# Altium PCB LEDPCB.PcbDoc
Units mm, origin at the board's own origin, x right, y up, seen from the top; angles counter-clockwise.
Board outline 20 x 20 mm, 2 copper layers (Top Layer, Bottom Layer), stack 1.671 mm thick; 5 components, 4 nets, 10 pads, 1 vias.
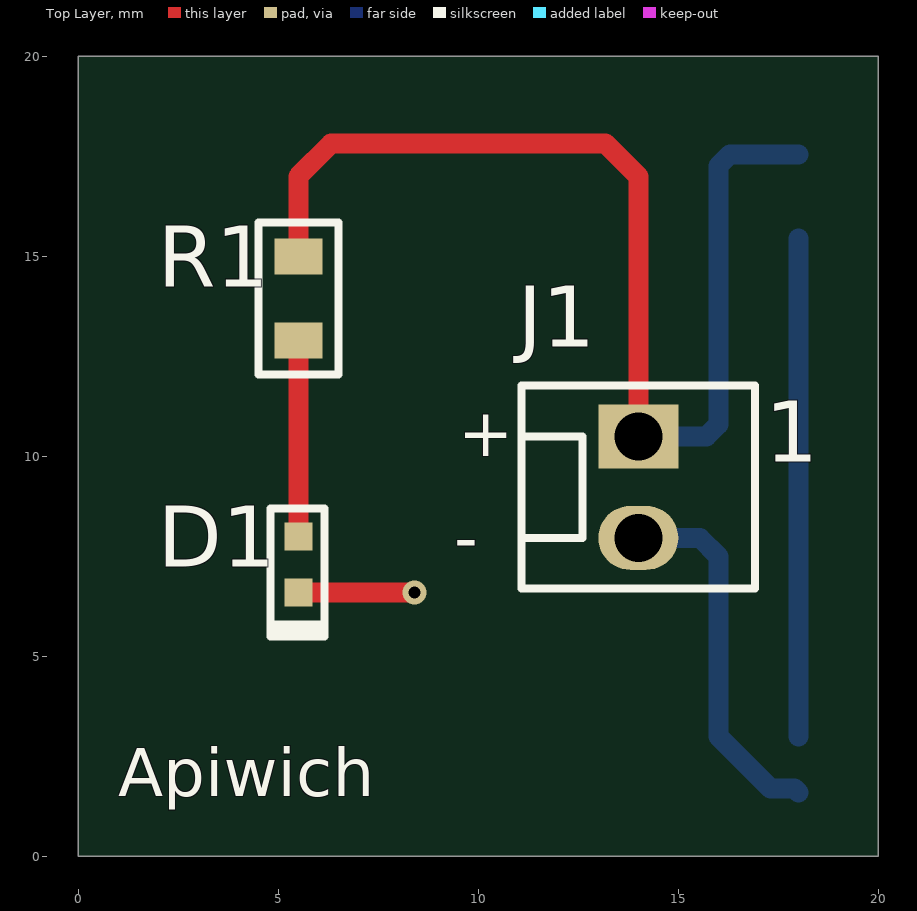
[diagram p0: Top Layer view]
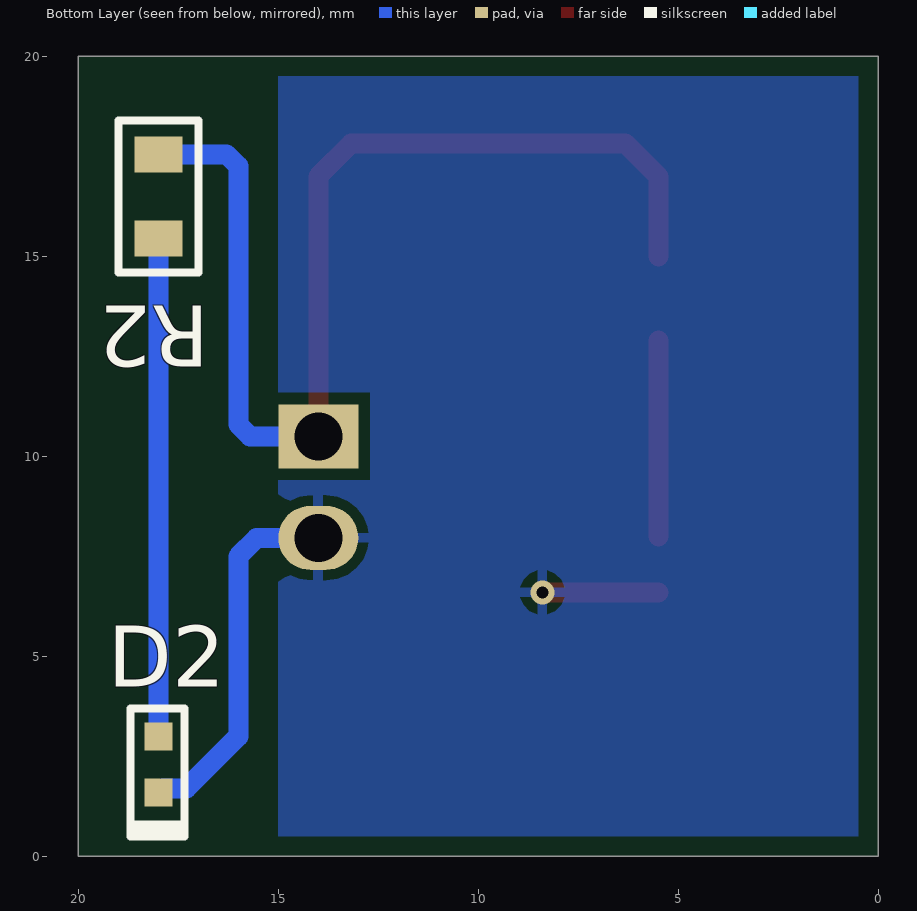
[diagram p1: Bottom Layer view, seen from below]
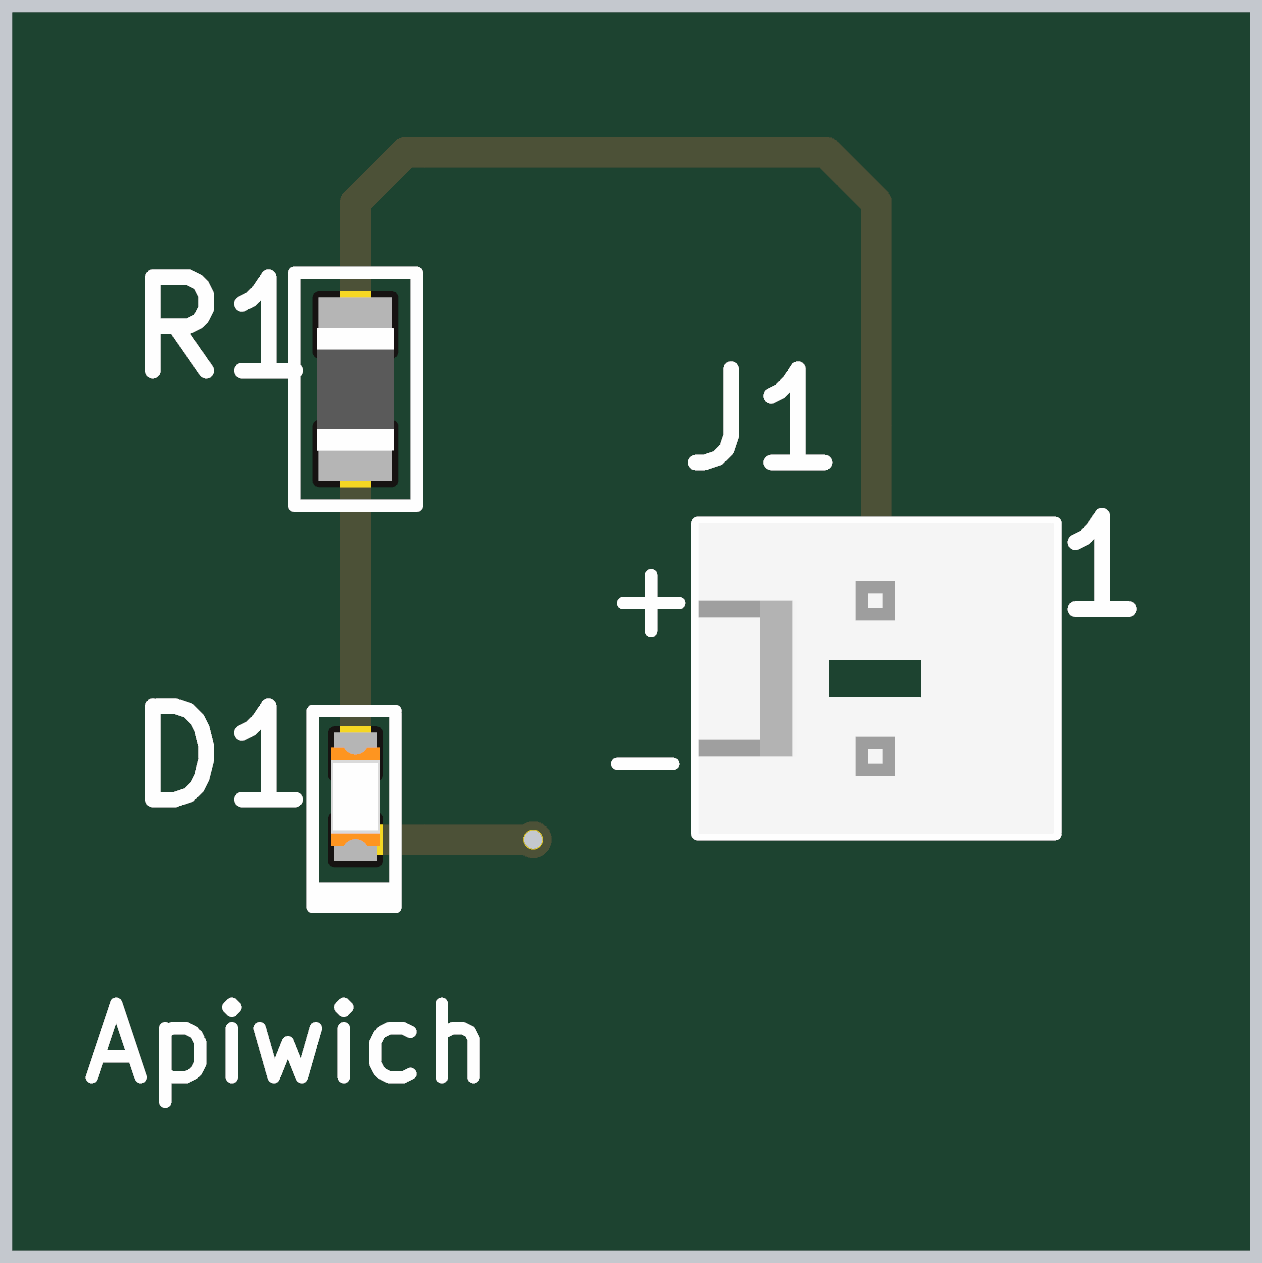
[diagram p2: 3D render of the assembled board from above, using the file's embedded part models]

## Layer stack, top to bottom
Top Solder: solder mask 0.0102, Solder Resist, Dk 3.5
Top Layer: signal copper 0.0356
Dielectric 1: dielectric 1.6, FR-4, Dk 4.8
Bottom Layer: signal copper 0.0356
Bottom Solder: solder mask 0.0102, Solder Resist, Dk 3.5

## Board outline
0,0 20,0 20,20 0,20

## Design rules (kind name [scope] priority, off if disabled: settings)
Clearance [All] p1: gap=0.3 ignorepadtopadclearanceinfootprint=FALSE
PolygonConnect [All] p1: connectstyle=Relief reliefconductorwidth=0.254 reliefentries=4 polygonreliefangle="90 Angle" airgapwidth=0.254
RoutingVias [All] p1: holewidth=0.3 width=0.6 viastyle="Through Hole" minholewidth=0.3 minwidth=0.6 maxholewidth=0.3 maxwidth=0.6
SilkToSolderMaskClearance [IsPad] p1: minsilkscreentomaskgap=0.1 clearancetoexposedcopper=TRUE
SolderMaskExpansion [All] p1: expansion=0.102 istentingtop=FALSE
SupplyNets "Schematic Supply Nets_1" [InNet('Ground')] p1: voltage=0.000
SupplyNets "Schematic Supply Nets" [InNet('+3V3')] p2: voltage=0.000
Width [All] p1: maxlimit=1 minlimit=0.3 preferedwidth=0.5
29 further rules are at their usual default settings.

## Components (designator, comment, footprint, x,y, rotation, side; value= is the part's Value field where it differs from the comment)
D1 "GREEN" LED0603G 5.5,7.3 r90 top
D2 "GREEN" LED0603G 18,2.3 r90 bottom
J1 "1x2 Header" HDR1x2 14,10.5 r0 top
R1 "360R" R0805 5.5,13.95 r270 top value=360Ω
R2 "360R" R0805 18,16.5 r270 bottom value=360Ω

## Footprints (in the part's own frame and the unit in brackets; to place one, negate y for a bottom-side part, rotate by r counter-clockwise, add the part's x,y. Pads: shape width x height; smd on the part's side, far side on the other; paste and mask are expansions set on the pad)
HDR1x2 [mm]
  rect 2x1.6 hole 1.2: 1(0,0)
  oval 2x1.6 hole 1.2: 2(0,-2.54)
  silkscreen extent -2.92,-3.81 2.92,1.27, body extent -2.9,-3.81 2.9,1.27, height 11.71
LED0603G [mm]
  rect 0.7x0.7 smd: 1(-0.7,0) 2(0.7,0)
  silkscreen extent -1.8,-0.65 1.4,0.7, body extent -0.8,-0.4 0.8,0.4, height 0.59
R0805 [mm]
  rect 0.9x1.2 smd: 1(-1.05,0) 2(1.05,0)
  silkscreen extent -1.9,-1 1.9,1, body extent -1,-0.63 1,0.63, height 0.61

## Part data
D1 D2: library part LSM0603453V, "LED GREEN CLEAR CHIP 0603 SMD", Case/Package=0603, Color=Green, Forward Current=20mA, Forward Voltage=3.4V, Manufacturer=VCC, Max Operating Temperature=85°C, Min Operating Temperature=-40°C, Power Dissipation=60mW, Reverse Voltage=5V, Supplier Part Number=LSM0603453VCT-ND, Category=LEDs, ComponentLink1Description=https://datasheet.octopart.com:443/LSM0603453V-Visual-Communications-datasheet-166617523.pdf?src-supplier=RS+(Formerly+Allied+Electronics), ComponentLink1URL=https://datasheet.octopart.com:443/LSM0603453V-Visual-Communications-datasheet-166617523.pdf?src-supplier=RS+(Formerly+Allied+Electronics), ComponentLink2Description=https://datasheet.octopart.com:443/LSM0603453V-Visual-Communications-datasheet-120107411.pdf?src-supplier=VCC, ComponentLink2URL=https://datasheet.octopart.com:443/LSM0603453V-Visual-Communications-datasheet-120107411.pdf?src-supplier=VCC, Height=600µm, Lifecycle Status=Production, Luminous Intensity=120mcd, Manufacturer Part Number=LSM0603453V, Mounting Technology="Surface Mount", Number of Circuits=1, Number of Terminals=2, Pricing="1=0.39, 10=0.266, 100=0.1218, 500=0.1086, 1000=0.1071 (USD)", REACH SVHC=Yes, RoHS=Compliant, Schedule B="8541402000, 8541406050, 8541406050|8541406050|8541406050|8541406050|8541406050", Shape=Rectangular, Stock=28175, Supplier=DigiKey, Terminal Pitch=1.3mm, Viewing Angle=110°, Wavelength=576nm
J1: library part 22-27-2021, "CONN HEADER VERT 2POS 2.54MM", Color=White, Contact Resistance=10mΩ, Current Rating=4A, Dielectric Material=Polyamide, Flammability Rating="UL94 V-0", Housing Color=Natural, Insulation Resistance=1GΩ, Manufacturer=Molex, Manufacturer Lifecycle Status=ACTIVE, Max Operating Temperature=75°C, Min Operating Temperature=0°C, Supplier Part Number=WM4111-ND, Voltage Rating=500V, Voltage Rating (AC)=250V, Approvals="CSA, UL", Category="Headers and Wire Housings", China RoHS=Compliant, ComponentLink1Description=https://datasheet.octopart.com:443/22-27-2021-Molex-datasheet-81843831.pdf?src-supplier=Upverter, ComponentLink1URL=https://datasheet.octopart.com:443/22-27-2021-Molex-datasheet-81843831.pdf?src-supplier=Upverter, ComponentLink2Description=https://datasheet.octopart.com:443/22-27-2021-Molex-datasheet-10979409.pdf?src-supplier=Molex, ComponentLink2URL=https://datasheet.octopart.com:443/22-27-2021-Molex-datasheet-10979409.pdf?src-supplier=Molex, ComponentLink3Description=https://datasheet.octopart.com:443/02227-2021-Molex-datasheet-13784872.pdf?src-supplier=Molex, ComponentLink3URL=https://datasheet.octopart.com:443/02227-2021-Molex-datasheet-13784872.pdf?src-supplier=Molex, ComponentLink4Description=https://datasheet.octopart.com:443/22-27-2021-Molex-datasheet-5315839.pdf?src-supplier=Future+Electronics, ComponentLink4URL=https://datasheet.octopart.com:443/22-27-2021-Molex-datasheet-5315839.pdf?src-supplier=Future+Electronics, ComponentLink5Description=https://datasheet.octopart.com:443/22272021-Molex-datasheet-137316104.pdf?src-supplier=Future+Electronics, ComponentLink5URL=https://datasheet.octopart.com:443/22272021-Molex-datasheet-137316104.pdf?src-supplier=Future+Electronics, ComponentLink6Description=https://datasheet.octopart.com:443/22-27-2021-Molex-datasheet-154747145.pdf?src-supplier=Master+Electronics, ComponentLink6URL=https://datasheet.octopart.com:443/22-27-2021-Molex-datasheet-154747145.pdf?src-supplier=Master+Electronics, ComponentLink7Description=https://datasheet.octopart.com:443/22-27-2021-Molex-datasheet-101581847.pdf?src-supplier=Farnell, ComponentLink7URL=https://datasheet.octopart.com:443/22-27-2021-Molex-datasheet-101581847.pdf?src-supplier=Farnell, ComponentLink8Description=https://datasheet.octopart.com:443/02227-2021-Molex-datasheet-14711101.pdf?src-supplier=Farnell, ComponentLink8URL=https://datasheet.octopart.com:443/02227-2021-Molex-datasheet-14711101.pdf?src-supplier=Farnell, ComponentLink9Description=https://datasheet.octopart.com:443/22-27-2021-Molex-datasheet-506551.pdf?src-supplier=Farnell, ComponentLink9URL=https://datasheet.octopart.com:443/22-27-2021-Molex-datasheet-506551.pdf?src-supplier=Farnell, ComponentLink10Description=https://datasheet.octopart.com:443/22-27-2021-Molex-datasheet-21538535.pdf?src-supplier=Newark, ComponentLink10URL=https://datasheet.octopart.com:443/22-27-2021-Molex-datasheet-21538535.pdf?src-supplier=Newark, ComponentLink11Description=https://datasheet.octopart.com:443/22-27-2021-Molex-datasheet-38329585.pdf?src-supplier=Newark, ComponentLink11URL=https://datasheet.octopart.com:443/22-27-2021-Molex-datasheet-38329585.pdf?src-supplier=Newark, ComponentLink12Description=https://datasheet.octopart.com:443/22-27-2021-Molex-datasheet-33021744.pdf?src-supplier=Newark, ComponentLink12URL=https://datasheet.octopart.com:443/22-27-2021-Molex-datasheet-33021744.pdf?src-supplier=Newark, ComponentLink13Description=https://datasheet.octopart.com:443/22-27-2021-Molex-datasheet-33002331.pdf?src-supplier=Newark, ComponentLink13URL=https://datasheet.octopart.com:443/22-27-2021-Molex-datasheet-33002331.pdf?src-supplier=Newark, ComponentLink14Description=https://datasheet.octopart.com:443/02227-2021-Molex-datasheet-21206939.pdf?src-supplier=Newark, ComponentLink14URL=https://datasheet.octopart.com:443/02227-2021-Molex-datasheet-21206939.pdf?src-supplier=Newark, ComponentLink15Description=https://datasheet.octopart.com:443/22-27-2021-Molex-datasheet-604178.pdf?src-supplier=element14+APAC, ComponentLink15URL=https://datasheet.octopart.com:443/22-27-2021-Molex-datasheet-604178.pdf?src-supplier=element14+APAC, ComponentLink16Description=https://datasheet.octopart.com:443/0022272021-Molex-datasheet-164461543.pdf?src-supplier=Sager+Electronics, ComponentLink16URL=https://datasheet.octopart.com:443/0022272021-Molex-datasheet-164461543.pdf?src-supplier=Sager+Electronics, ComponentLink17Description=https://datasheet.octopart.com:443/22-27-2021-Molex-datasheet-158567618.pdf?src-supplier=RS+(Formerly+Allied+Electronics), ComponentLink17URL=https://datasheet.octopart.com:443/22-27-2021-Molex-datasheet-158567618.pdf?src-supplier=RS+(Formerly+Allied+Electronics), ComponentLink18Description=https://datasheet.octopart.com:443/22-27-2021-Molex-datasheet-140181058.pdf?src-supplier=RS+(Formerly+Allied+Electronics), ComponentLink18URL=https://datasheet.octopart.com:443/22-27-2021-Molex-datasheet-140181058.pdf?src-supplier=RS+(Formerly+Allied+Electronics), ComponentLink19Description=https://datasheet.octopart.com:443/22-27-2021-Molex-datasheet-120145351.pdf?src-supplier=RS+(Formerly+Allied+Electronics), ComponentLink19URL=https://datasheet.octopart.com:443/22-27-2021-Molex-datasheet-120145351.pdf?src-supplier=RS+(Formerly+Allied+Electronics), ComponentLink20Description=https://datasheet.octopart.com:443/22-27-2021-Molex-datasheet-9995492.pdf?src-supplier=RS+(Formerly+Allied+Electronics), ComponentLink20URL=https://datasheet.octopart.com:443/22-27-2021-Molex-datasheet-9995492.pdf?src-supplier=RS+(Formerly+Allied+Electronics), ComponentLink21Description=https://datasheet.octopart.com:443/22-27-2021-Molex-datasheet-155977274.pdf?src-supplier=SOS+electronic, ComponentLink21URL=https://datasheet.octopart.com:443/22-27-2021-Molex-datasheet-155977274.pdf?src-supplier=SOS+electronic, ComponentLink22Description=https://datasheet.octopart.com:443/22-27-2021-Molex-datasheet-62103479.pdf?src-supplier=Electro+Sonic, ComponentLink22URL=https://datasheet.octopart.com:443/22-27-2021-Molex-datasheet-62103479.pdf?src-supplier=Electro+Sonic, ComponentLink23Description=https://datasheet.octopart.com:443/22-27-2021-Molex-datasheet-37168867.pdf?src-supplier=Electro+Sonic, ComponentLink23URL=https://datasheet.octopart.com:443/22-27-2021-Molex-datasheet-37168867.pdf?src-supplier=Electro+Sonic, ComponentLink24Description=https://datasheet.octopart.com:443/22-27-2021-Molex-datasheet-151821780.pdf?src-supplier=Toby+Electronics, ComponentLink24URL=https://datasheet.octopart.com:443/22-27-2021-Molex-datasheet-151821780.pdf?src-supplier=Toby+Electronics, ComponentLink25Description=https://datasheet.octopart.com:443/22-27-2021-Molex-datasheet-124775.pdf?src-supplier=DigiKey, ComponentLink25URL=https://datasheet.octopart.com:443/22-27-2021-Molex-datasheet-124775.pdf?src-supplier=DigiKey, ComponentLink26Description=https://datasheet.octopart.com:443/22-27-2021-Molex-datasheet-7627818.pdf?src-supplier=Jameco, ComponentLink26URL=https://datasheet.octopart.com:443/22-27-2021-Molex-datasheet-7627818.pdf?src-supplier=Jameco, ComponentLink27Description=https://datasheet.octopart.com:443/22-27-2021-Molex-datasheet-17586671.pdf?src-supplier=TME, ComponentLink27URL=https://datasheet.octopart.com:443/22-27-2021-Molex-datasheet-17586671.pdf?src-supplier=TME, ComponentLink28Description=http://sigma.octopart.com:80/16297726/rohs_statement/Molex-02227-2021.pdf?src-supplier=Compliance+Statements, ComponentLink28URL=http://sigma.octopart.com:80/16297726/rohs_statement/Molex-02227-2021.pdf?src-supplier=Compliance+Statements, ComponentLink29Description=http://sigma.octopart.com:80/conflict_mineral_statement/Molex-company-72.pdf?src-supplier=Compliance+Statements, ComponentLink29URL=http://sigma.octopart.com:80/conflict_mineral_statement/Molex-company-72.pdf?src-supplier=Compliance+Statements, ComponentLink30Description=http://sigma.octopart.com:80/rohs_statement/Molex-company-73.pdf?src-supplier=Compliance+Statements, ComponentLink30URL=http://sigma.octopart.com:80/rohs_statement/Molex-company-73.pdf?src-supplier=Compliance+Statements, ComponentLink31Description=http://sigma.octopart.com:80/reach_statement/Molex-company-74.pdf?src-supplier=Compliance+Statements, ComponentLink31URL=http://sigma.octopart.com:80/reach_statement/Molex-company-74.pdf?src-supplier=Compliance+Statements, Contact Gender=Male, Contact Material=Brass, Contact Plating=Tin, Country of Origin=TH, Depth=5.8mm, Gender=Male, Height=12.05mm, Housing Material=Nylon, Lead Free="Lead Free", Lead Pitch=2.54mm, Length=10.16mm, Lifecycle Status=Production, Manufacturer Part Number=22-27-2021, Material=Nylon, Max Current Rating=4A, Mounting Technology="Through Hole", Number of Circuits=2, Number of Contacts=2, Number of Positions=2, Number of Rows=1, Orientation=Vertical, Pins=2, Pitch=2.54mm, Plating=Tin, Plating Thickness=2.54µm, Pricing="1=0.24, 10=0.208, 100=0.1765, 500=0.15752, 2850=0.13929, 5700=0.13264, 11400=0.12631 (USD)", Radiation Hardening=No, REACH SVHC=Yes, RoHS=Compliant, Schedule B="8536694040, 8536694040|8536694040|8536694040|8536694040|8536694040|8536694040|8536694040|8536694040|8536694040|8536694040|8536694040|8536694040|8536694040|8536694040|8536694040|8536694040|8536694040|8536694040|8536694040|8536694040|8536694040|8536694040|8536694040|85", Stock=100812, Supplier=DigiKey, Terminal Pitch=2.54mm, Termination=Solder, Voltage Rating (DC)=250V, Working Voltage=250V
R1 R2: library part AC0805FR-07360RL, "RES SMD 360 OHM 1% 1/8W 0805", Case/Package=0805, Manufacturer="Yageo Group", Max Operating Temperature=155°C, Max Power Dissipation=125mW, Min Operating Temperature=-55°C, Supplier Part Number=13-AC0805FR-07360RLCT-ND, Temperature Coefficient=100ppm/°C, Tolerance=1%, Voltage Rating=150V, Category="Chip SMD Resistors", China RoHS=Non-Compliant, ComponentLink1Description=https://datasheet.octopart.com:443/AC0805FR-07360RL-Yageo-datasheet-182189377.pdf?src-supplier=IHS, ComponentLink1URL=https://datasheet.octopart.com:443/AC0805FR-07360RL-Yageo-datasheet-182189377.pdf?src-supplier=IHS, ComponentLink2Description=https://datasheet.octopart.com:443/AC0805FR-07360RL-Yageo-datasheet-83209224.pdf?src-supplier=Upverter, ComponentLink2URL=https://datasheet.octopart.com:443/AC0805FR-07360RL-Yageo-datasheet-83209224.pdf?src-supplier=Upverter, ComponentLink3Description=https://datasheet.octopart.com:443/AC0805FR-07360RL-Yageo-datasheet-178509465.pdf?src-supplier=Farnell, ComponentLink3URL=https://datasheet.octopart.com:443/AC0805FR-07360RL-Yageo-datasheet-178509465.pdf?src-supplier=Farnell, ComponentLink4Description=https://datasheet.octopart.com/AC0805FR-07360RL-Yageo-datasheet-12512238.pdf, ComponentLink4URL=https://datasheet.octopart.com/AC0805FR-07360RL-Yageo-datasheet-12512238.pdf, ComponentLink5Description=http://sigma.octopart.com:80/rohs_statement/Yageo-company-2.pdf?src-supplier=Compliance+Statements, ComponentLink5URL=http://sigma.octopart.com:80/rohs_statement/Yageo-company-2.pdf?src-supplier=Compliance+Statements, ComponentLink6Description=http://sigma.octopart.com:80/conflict_mineral_statement/Yageo-company-3.pdf?src-supplier=Compliance+Statements, ComponentLink6URL=http://sigma.octopart.com:80/conflict_mineral_statement/Yageo-company-3.pdf?src-supplier=Compliance+Statements, Composition="Thick Film", Depth=1.25mm, Features="Automotive AEC-Q200, Moisture Resistant", Height=500µm, Length=2.0066mm, Lifecycle Status=Production, Manufacturer Part Number=AC0805FR-07360RL, Military Standard=Not, Mounting Technology="Surface Mount", Number of Terminals=2, Number of Terminations=2, Power Dissipation=125mW, Pricing="1=0.1, 10=0.035, 25=0.0264, 50=0.0214, 100=0.0177, 250=0.014, 500=0.01188, 1000=0.01021 (USD)", REACH SVHC=Yes, RoHS=Compliant, Stock=172, Supplier=DigiKey, Width=1.25mm, Working Voltage=150V

## Via types
v1: diameter 0.6, hole 0.3, Top Layer to Bottom Layer, tented both sides, 1 vias

## Nets (pads, with @x,y where several pads share a name; then routed paths per layer and width w, separated by ;. In a path a pad name is that pad's centre, name@x,y a point inside that pad or via, vN(x,y) a via of type N, cw(c..) or ccw(c..) an arc to the next point about the centre after c; other vN are vias at no path point)
+3V3: J1.1 R1.1 R2.1 | length 28.4
  Top Layer w0.5: R1.1 5.5,17 6.317,17.817 13.183,17.817 14,17 J1.1
  Bottom Layer w0.5: J1.1 15.707,10.5 16,10.793 16,17.257 16.293,17.55 R2.1
DIODE1: D1.2 R1.2 | length 4.9
  Top Layer w0.5: D1.2 R1.2
DIODE2: D2.2 R2.2 | length 12.5
  Bottom Layer w0.5: D2.2 R2.2
Ground: D1.1 D2.1 J1.2 | length 12.2
  Top Layer w0.5: D1.1 v1(8.4,6.6)
  Bottom Layer w0.5: J1.2 15.54,7.96 16,7.5 16,3 17.3,1.7 17.9,1.7 D2.1

## Polygon pours and split planes (outlines as drawn)
Ground on Bottom Layer "GROUND_L02_P000" (solid, pour order 0): 0.5,0.5 15,0.5 15,19.5 0.5,19.5

## Silkscreen, mask and mechanical layers (free items; w line width, h text height)
Top Overlay:
  text "+" at 9.5,10 h1.2
  text "-" at 9.403,7.377 h1.2
  text "Apiwich" at 1,1.5 h1.2
Board:
  the board outline again, w0.2

## Text inside footprints (layer, text, board x,y; h text height)
J1: Top Overlay "1" at 17.175,9.865 h1.52